# Altium PCB SCH_RS485_1.PcbDoc
Units mm, origin at the board's own origin, x right, y up, seen from the top; angles counter-clockwise.
Board outline 48 x 24 mm, 2 copper layers (Top Layer, Bottom Layer); 25 components, 14 nets, 65 pads, 3 vias.
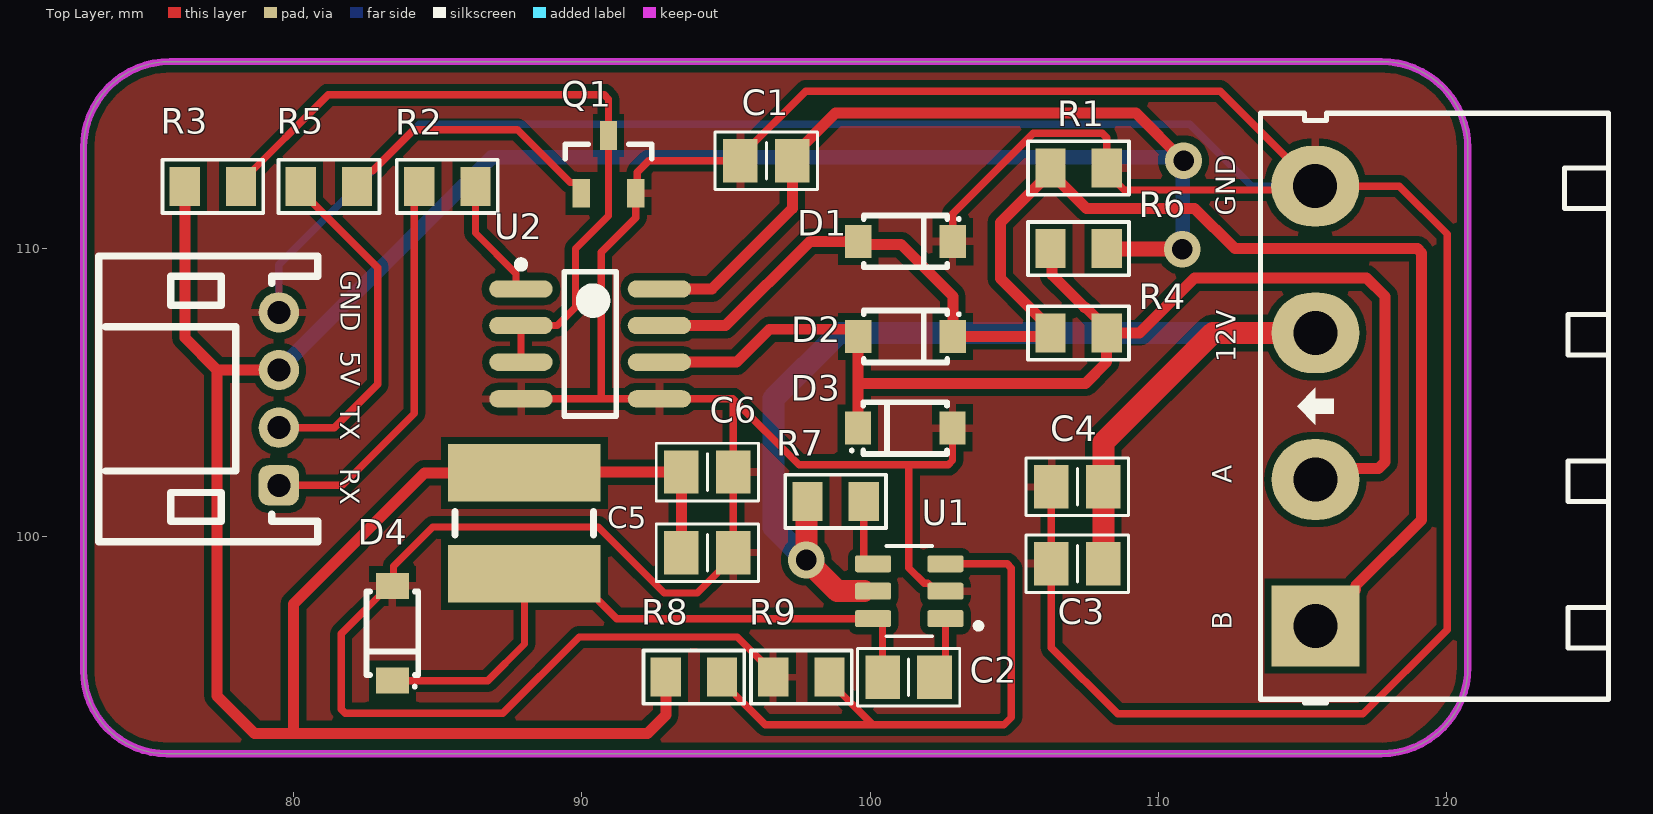
[diagram p0: Top Layer view]
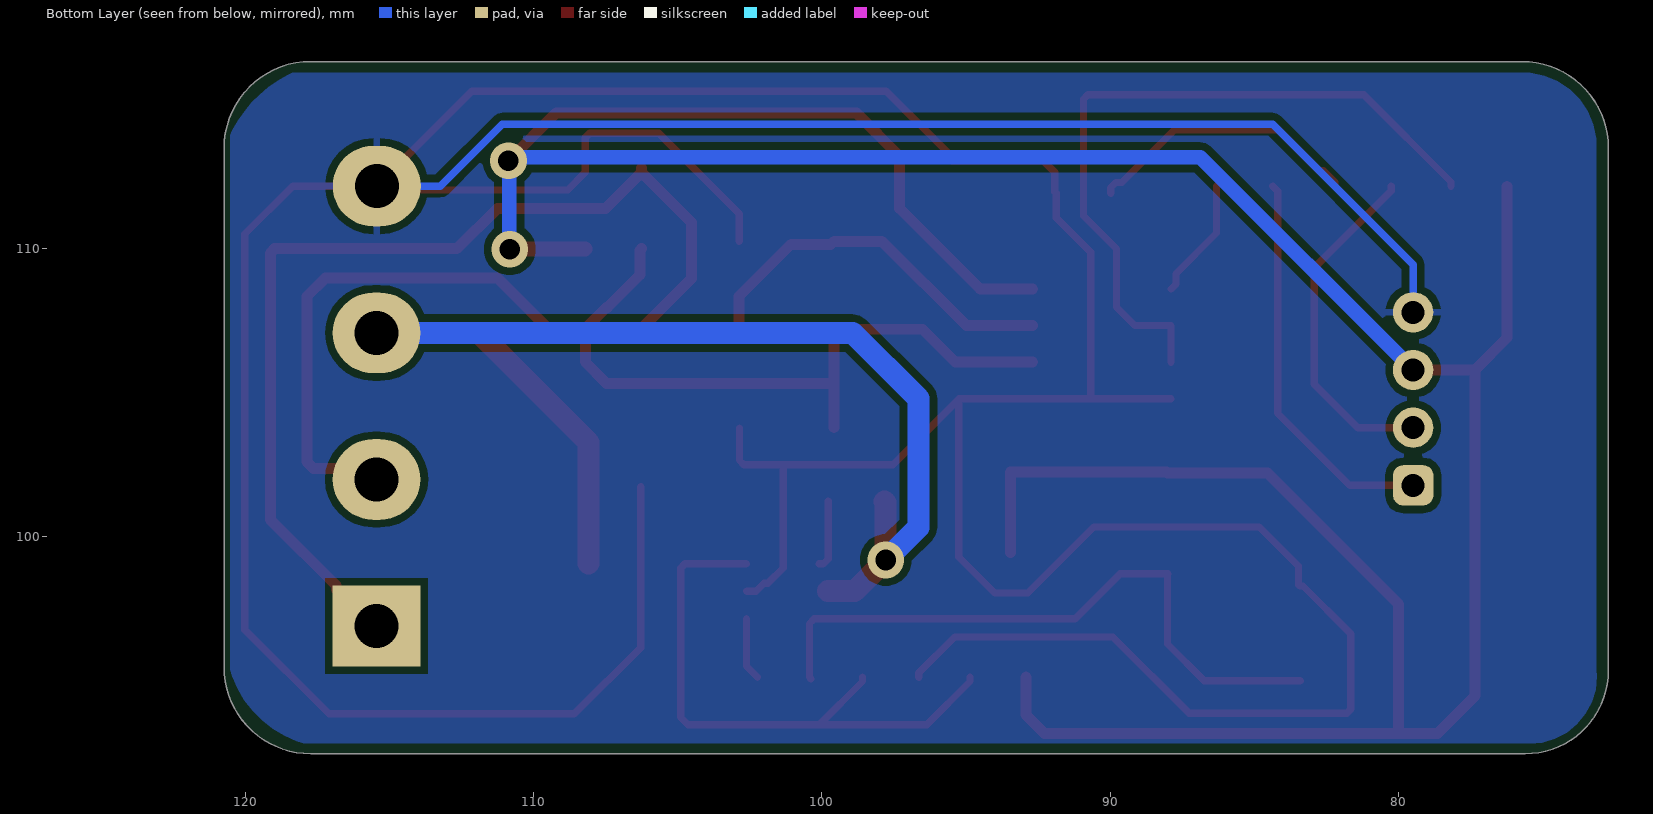
[diagram p1: Bottom Layer view, seen from below]

## Layer stack, top to bottom
Top Solder: solder mask 0.0102, Solder Resist, Dk 3.5
Top Layer: signal copper 0.0356
Dielectric 1: dielectric 0.32, FR-4, Dk 4.8
Bottom Layer: signal copper 0.0356
Bottom Solder: solder mask 0.0102, Solder Resist, Dk 3.5

## Board outline
75.618,92.471 cw(c75.618,95.36) 72.729,95.36 72.729,113.471 cw(c75.729,113.471) 75.729,116.471 117.729,116.471 cw(c117.729,113.471) 120.729,113.471 120.729,95.471 cw(c117.729,95.471) 117.729,92.471

## Design rules (kind name [scope] priority, off if disabled: settings)
Clearance [All] p1: gap=0.254 ignorepadtopadclearanceinfootprint=FALSE except(0: Arc-Hole Track-Hole SMDPad-Hole THPad-Hole Via-Hole Fill-Hole Poly-Hole Region-Hole Text-Hole)
PolygonConnect [All] p1: connectstyle=Relief reliefconductorwidth=0.254 reliefentries=4 polygonreliefangle="90 Angle" airgapwidth=0.254
RoutingVias [All] p1: holewidth=0.711 width=1.27 viastyle="Through Hole" minholewidth=0.711 minwidth=1.27 maxholewidth=0.711 maxwidth=1.27
SolderMaskExpansion [All] p1: expansion=0.102 istentingtop=FALSE
Width [All] p1: maxlimit=0.889 minlimit=0.254 preferedwidth=0.254 minimp=50.000000 maximp=50.000000 favimp=50.000000
30 further rules are at their usual default settings.

## Classes and differential pairs
component class SCH_RS485: C1 C2 C3 C4 C5 C6 D1 D2 D3 D4 Q1 R1 R2 R3 R4 R5 R6 R7 R8 R9 U1 U2

## Components (designator, comment, footprint, x,y, rotation, side; value= is the part's Value field where it differs from the comment)
C1 "100n" "C 0805" 96.404,113.03 r0 top
C2 "100n" "C 0805" 101.335,95.123 r180 top
C3 "10u" "C 0805" 107.188,99.06 r180 top
C4 "10u" "C 0805" 107.188,101.727 r180 top
C5 "10u" "C 0805" 94.361,99.441 r0 top
C6 "100n" "C 0805" 94.361,102.235 r0 top
D1 "Diode ESD/TVS" SOD123 101.23,110.236 r0 top
D2 "Diode ESD/TVS" SOD123 101.23,106.934 r0 top
D3 "Diode ESD/TVS" SOD123 101.219,103.759 r180 top
D4 "Diode" SOD123 83.439,96.647 r270 top
L? "Inductor" "Inductor SMD CDRH3D48" 88.011,100.457 r90 top
P? "Header 4" HDR/Terminal/4/RA 115.44,104.524 r90 top
P? "Header 4" HDR/Header/4/2mm/BOX/RA 79.502,104.775 r90 top
Q1 "Transistor NPN" SOT-23 90.932,112.903 r90 top (schematic designator Q?)
R1 "4.7K" "R 0805" 107.229,112.776 r0 top
R2 "1k" "R 0805" 85.344,112.141 r180 top
R3 "4.7K" "R 0805" 77.216,112.141 r180 top
R4 "120" "R 0805" 107.229,107.061 r180 top
R5 "1K" "R 0805" 81.239,112.141 r0 top
R6 "4.7K" "R 0805" 107.229,109.982 r180 top
R7 "100k" "R 0805" 98.806,101.219 r0 top
R8 "51k" "R 0805" 93.894,95.123 r180 top
R9 "10k" "R 0805" 97.622,95.123 r0 top
U1 "LM2734YMK/NOPB" SOT95P280X110-6N 101.361,98.105 r180 top
U2 "MAX485" SOIC-8 90.297,106.68 r0 top

## Footprints (in the part's own frame and the unit in brackets; to place one, negate y for a bottom-side part, rotate by r counter-clockwise, add the part's x,y. Pads: shape width x height; smd on the part's side, far side on the other; paste and mask are expansions set on the pad)
"C 0805" [mm] "Chip Capacitor, 2-Leads, Body 2.0x1.3mm, IPC Medium Density"
  rect 1.2x1.5 smd: 1(-0.9,0) 2(0.9,0)
  silkscreen extent -1.78,-1 1.78,1, body extent -1,-0.64 1,0.61, height 0.6
HDR/Header/4/2mm/BOX/RA [mm]
  rrect50% 1.4x1.4 hole 0.8: 1(-3,0)
  round 1.4 hole 0.8: 2(-1,0) 3(1,0) 4(3,0)
  silkscreen extent -4.95,-1.35 4.95,6.25, body extent -4.95,-1.35 4.95,6.25, height 4.8
HDR/Terminal/4/RA [mil] "Header 4, 4 pin, hight 300mil, Pin to Pin 200, Colour Green"
  rect 110x120 hole 60: 1(-300.2,-0.2)
  oval 110x120 hole 60: 2(-100.2,-0.2) 3(99.87,-0.13) 4(300.2,0.2)
  silkscreen extent -405,-400 400,75, body extent -390,-403 392,70, height 334
"Inductor SMD CDRH3D48" [mm] "Precision Wire Wound Inductor, 2-Leads, Body 10.0x8.0mm, IPC Low Density"
  rect 2x5.3 smd: 1(-1.75,0) 2(1.75,0)
  silkscreen extent -0.4,-2.4 0.4,2.4, body extent -2.25,-2.24 2.25,2.25, height 3.5
"R 0805" [mm] "Chip Resistor, 2-Leads, Body 2.0x1.3mm, IPC Medium Density"
  rect 1.05x1.35 smd: 1(-0.975,0) 2(0.975,0)
  silkscreen extent -1.75,-0.92 1.75,0.92, body extent -1,-0.61 1,0.59, height 0.5
SOD123 [mm] "Molded Diode, 2-Leads, Body 2.7x1.6mm, IPC Medium Density"
  rect 0.91x1.143 smd: 1(-1.64,0) 2(1.64,0)
  silkscreen extent -1.45,-0.9 1.9,0.9, body extent -1.85,-0.78 1.85,0.77, height 1.35
SOIC-8 [mm] "SOIC, 8-Leads, Body 5.0x4.0mm (max), Pitch 1.27mm, IPC Medium Density"
  oval 2.2x0.6 smd: 1(-2.4,1.905) 2(-2.4,0.635) 3(-2.4,-0.635) 4(-2.4,-1.905) 5(2.4,-1.905) 6(2.4,-0.635) 7(2.4,0.635) 8(2.4,1.905)
  silkscreen extent -2.52,-2.5 0.9,2.88, body extent -3,-2.49 3,2.41, height 1.75
SOT95P280X110-6N [mm]
  rrect25% 1.25x0.59 smd: 1(-1.255,0.95) 2(-1.255,0) 3(-1.255,-0.95) 4(1.255,-0.95) 5(1.255,0) 6(1.255,0.95)
  silkscreen extent -2.5,-1.57 0.8,1.57, body extent -1.4,-1.45 1.4,1.45, height 1.1
SOT-23 [mm] "SOT23, 3-Leads, Body 3.0x2.5mm (max), Pitch 0.95mm, IPC Medium Density"
  rect 1x0.6 smd: 1(-1,0.95) 2(-1,-0.95) 3(1,0)
  silkscreen extent 0.2,-1.5 0.7,1.5, body extent -1.28,-1.46 1.27,1.46, height 0.95

## Part data
C1 C2 C3 C4 C5 C6: library part "Capacitor NP", "Capacitor non-pol"
D4: "Default Diode"
P? P?: "Header, 4-Pin"
Q1: "NPN Bipolar Transistor"
R1 R2 R3 R4 R5 R6 R7 R8 R9: library part Resistor, "Resistor"
U1: "3V to 20V Input, 1A Step-Down Converter with Light Load Efficiency 6-SOT-23-THIN -40 to 125", PACKAGE="SOT-23-THN-6 Texas Instruments", Availability="In Stock", Check_prices=https://www.snapeda.com/parts/LM2734YMK/Texas+Instruments/view-part/?ref=eda, MF="Texas Instruments", MP=LM2734YMK, Price=None, Purchase-URL=https://pricing.snapeda.com/search/part/LM2734YMK/?ref=eda, SnapEDA_Link=https://www.snapeda.com/parts/LM2734YMK/Texas+Instruments/view-part/?ref=snap
U2: "Low-Power, Slew-Rate-Limited  RS-485/RS-422 Transceivers"

## Via types
v1: diameter 1.27, hole 0.711, Top Layer to Bottom Layer, 3 vias

## Nets (pads, with @x,y where several pads share a name; then routed paths per layer and width w, separated by ;. In a path a pad name is that pad's centre, name@x,y a point inside that pad or via, vN(x,y) a via of type N, cw(c..) or ccw(c..) an arc to the next point about the centre after c; other vN are vias at no path point)
+5: C1.2 C5.1 C6.1 L?.2 P?.3@79.502,105.775 R3.2 R6.1 R8.2 U2.8 | length 123.2
  Top Layer w0.381: R3.2 76.241,106.893 77.359,105.775 ; P?.3@79.502,105.775 77.359,105.775 ; U2.8 94.513,108.585 97.304,111.376 97.304,113.18 98.805,114.681 109.22,114.681 v1(110.871,113.03) ; R8.2 92.919,93.808 92.28,93.169 80.01,93.169 ; C5.1 C6.1 88.039,102.235 L?.2 84.554,102.207 80.01,97.663 80.01,93.169 ; 77.359,105.775 77.359,94.472 78.662,93.169 80.01,93.169
  Top Layer w0.508: R6.1 108.216,109.97 110.815,109.97 v1(110.827,109.958)
  Bottom Layer w0.508: P?.3@79.502,105.775 86.884,113.157 110.744,113.157 v1(110.871,113.03) 110.849,113.008 110.849,109.98 v1(110.827,109.958)
+12: C3.1 C4.1 P?.3@115.443,107.061 R7.1 U1.5 | length 43.4
  Top Layer w0.762: R7.1 97.79,101.178 v1(97.79,99.187) 98.866,98.111 U1.5@99.799,98.111 ; C3.1 108.088,103.262 111.887,107.061 P?.3@115.443,107.061
  Bottom Layer w0.762: v1(97.79,99.187) 96.656,100.321 96.656,104.784 98.933,107.061 P?.3@115.443,107.061
A: D2.1 D3.2 P?.2@115.445,101.979 R4.1 R6.2 U2.6 | length 43.4
  Top Layer w0.381: U2.6 95.377,106.045 96.52,107.188 99.389,107.188 99.59,106.987 99.59,105.312 ; D3.2@99.579,103.782 99.59,103.793 99.59,105.312 ; R6.2 106.317,109.919 106.317,109.075 107.442,107.95 107.465,107.95 108.204,107.211 R4.1 ; P?.2@115.445,101.979 115.822,102.357 117.633,102.357 117.856,102.58 117.856,108.331 117.221,108.966 111.252,108.966 109.347,107.061 R4.1 ; 99.59,105.312 107.471,105.312 108.204,106.045 R4.1
B: D1.1 D2.2 P?.1@115.445,96.899 R1.1 R4.2 U2.7 | length 52.7
  Top Layer w0.381: U2.7 94.996,107.315 97.917,110.236 D1.1 99.706,110.12 101.081,110.12 102.87,108.331 D2.2 105.977,106.934 R4.2@106.179,107.136 ; R4.2 106.254,107.211 104.521,108.944 104.521,110.893 R1.1@106.254,112.626 ; R1.1 R1.1@106.254,112.626 ; P?.1@115.445,96.899 115.572,96.899 116.842,98.169 116.842,98.296 119.126,100.581 119.126,109.833 118.977,109.982 112.649,109.982 111.252,111.379 107.501,111.379 R1.1@106.254,112.626
GND: C1.1 C3.2 C4.2 C5.2 C6.2 D1.2 D3.1 D4.1 P?.4 Q1.2 R1.2 R9.1 U1.2 U2.4 U2.5 | length 195.8
  Top Layer w0.254: U2.4 90.678,104.775 ; R9.1 96.647,95.273 95.4,96.52 89.916,96.52 87.264,93.868 81.81,93.868 81.661,94.017 81.661,96.625 83.323,98.287 D4.1 83.48,98.328 83.48,98.974 84.836,100.33 90.577,100.33 92.863,98.044 94.014,98.044 95.261,99.291 C5.2 C6.2 95.261,104.764 ; U1.2 102.286,98.105 102.012,98.379 101.876,98.379 101.346,98.909 101.346,102.489 ; D3.1 102.859,102.638 102.71,102.489 101.346,102.489 ; D1.2 102.87,111.188 105.662,113.981 108.055,113.981 108.204,113.832 108.204,112.626 108.816,112.014 115.299,112.014 P?.4@115.435,112.149 ; C4.2 C3.2 106.288,96.15 108.585,93.853 117.094,93.853 120.015,96.774 120.015,110.49 118.356,112.149 P?.4@115.435,112.149 ; 90.678,104.775 90.678,109.855 91.882,111.059 Q1.2 91.934,111.955 91.934,112.635 92.329,113.03 C1.1 95.504,113.18 97.767,115.443 112.141,115.443 P?.4@115.435,112.149 ; 90.678,104.775 U2.5 95.25,104.775 95.261,104.764 ; 95.261,104.764 97.536,102.489 101.346,102.489
  Bottom Layer w0.254: P?.4@79.502,107.775 79.502,109.429 84.373,114.3 111.09,114.3 113.241,112.149 P?.4@115.435,112.149
NetC2_1: C2.1 U1.1 | length 2.2
  Top Layer w0.254: C2.1 102.616,95.504 U1.1
NetC2_2: C2.2 D4.2 L?.1 U1.6 | length 22.6
  Top Layer w0.254: D4.2@83.413,94.996 86.741,94.996 88.022,96.277 88.022,98.696 L?.1 89.661,98.707 91.213,97.155 100.267,97.155 100.435,96.987 C2.2 C2.2@100.385,95.073
NetQ?_1: Q1.1 R5.2 | length 9.7
  Top Layer w0.254: R5.2 82.214,112.291 82.612,112.689 82.762,112.689 84.18,114.107 87.778,114.107 89.609,112.276 89.809,112.276 89.982,112.103 Q1.1
NetQ?_3: Q1.3 R3.1 U2.2 U2.3 | length 25.3
  Top Layer w0.254: R3.1 78.191,112.291 81.216,115.316 90.783,115.316 90.932,115.167 Q1.3 90.932,111.125 89.789,109.982 89.789,107.95 89.154,107.315 U2.2 U2.3
NetR2_1: R2.1 U2.1 | length 4.2
  Top Layer w0.254: R2.1 86.319,110.525 87.727,109.117 87.727,108.745 87.886,108.585 U2.1
NetR7_2: R7.2 U1.4 | length 2.4
  Top Layer w0.254: R7.2 99.781,99.223 99.949,99.055 U1.4
NetR8_1: R8.1 R9.2 U1.3 | length 20.7
  Top Layer w0.254: R8.1 94.869,94.973 96.37,93.472 100.098,93.472 ; R9.2 98.597,94.973 100.098,93.472 ; U1.3 104.753,99.055 104.902,98.906 104.902,93.726 104.648,93.472 100.098,93.472
RX: P?.1@79.502,101.775 R2.2 | length 13.7
  Top Layer w0.254: P?.1@79.502,101.775 81.709,101.775 84.201,104.267 84.201,111.973 R2.2
TX: P?.2@79.502,103.775 R5.1 | length 12
  Top Layer w0.254: P?.2@79.502,103.775 81.423,103.775 82.931,105.283 82.931,109.324 80.264,111.991 R5.1

## Polygon pours and split planes (outlines as drawn)
GND on Bottom Layer "GND_L02_P002" (solid, pour order 2): 73.152,113.538 cw(c75.692,113.538) 75.692,116.078 118.364,116.078 cw(c116.48,112.035) 120.523,113.919 120.523,95.377 cw(c116.878,96.482) 117.983,92.837 75.565,92.837 75.252,92.837 cw(c75.472,95.157) 73.152,95.377
GND on Top Layer "GND_L01_P000" (solid, pour order 0): 72.771,113.792 cw(c76.268,112.974) 75.45,116.471 117.729,116.471 cw(c116.429,112.17) 120.729,113.471 120.65,113.391 120.65,95.758 cw(c116.193,96.927) 117.363,92.471 75.618,92.471 75.057,92.71 cw(c75.78,95.631) 72.771,95.631

## Keep-outs
Top Layer:
  the board outline again, w0.254

## Silkscreen, mask and mechanical layers (free items; w line width, h text height)
Top Overlay:
  text "GND" at 112.89,111.125 h1.14 r90
  text "GND" at 81.42,109.22 h1.14 r270
  text "5V" at 81.42,106.426 h1.14 r270
  text "12V" at 112.903,106.045 h1.14 r90
  text "TX" at 81.407,104.521 h1.14 r270
  text "RX" at 81.407,102.362 h1.14 r270
  text "A" at 112.776,101.854 h1.14 r90
  text "B" at 112.776,96.774 h1.14 r90